# EAGLE board MTG COUNTER (EAGLE 9.7.0)

Size 113.33 x 124.01 mm. Coordinates in mm from the lower left corner, seen from the top.
Outline: 0,0 113.33,0 113.33,124.01 0,124.01 0,0
Copper layers (1*16): Top 0.035mm / dielectric 1.5mm / Bottom 0.035mm
Design rules "default": minimum track width 6mil, minimum drill 0.35mm, track to track 6mil, track to pad 6mil, pad to pad 6mil, via to via 6mil, smd to smd 6mil, copper to edge 40mil, drill to drill 6mil, minimum pad ring 10mil, minimum via ring 8mil, stop-mask expansion 4mil, vias tented up to drill 0mil, thermal gap 10mil

## Footprints (pad centres in the part's own frame; a part is rotated, then mirrored left to right if it is on the bottom)
7SEG-13 = drill 0.813 long: 1 -5.08,-7.62; 2 -2.54,-7.62; 3 0,-7.62; 4 2.54,-7.62; 5 5.08,-7.62; 6 5.08,7.62; 7 2.54,7.62; 8 0,7.62; 9 -2.54,7.62; 10 -5.08,7.62
RESAD1016W63L850D250B = drill 0.83 pad 1.43: 1 -5.08,0; 2 5.08,0
SWITCH-MOMENTARY-PTH-6.5MM = drill 1.016 pad 1.88: 1 -3.251,2.261; 2 3.251,2.261; 3 -3.251,-2.261; 4 3.251,-2.261
ARDUINO-UNO-R3-SHIELD = drill 1.016 pad 1.88: 3.3V 24.13,-2.54; 5V 24.13,0; A0 24.13,12.7; A1 24.13,15.24; A2 24.13,17.78; A3 24.13,20.32; A4 24.13,22.86; A5 24.13,25.4; AREF -24.13,-13.97; D2 -24.13,20.32; D3 -24.13,17.78; D4 -24.13,15.24; D5 -24.13,12.7; D6 -24.13,10.16; D7 -24.13,7.62; D8 -24.13,3.81; D9 -24.13,1.27; D10 -24.13,-1.27; D11 -24.13,-3.81; D12 -24.13,-6.35; D13 -24.13,-8.89; GND@0 24.13,2.54; GND@1 24.13,5.08; GND@2 -24.13,-11.43; IOREF 24.13,-7.62; NC 24.13,-10.16; RES 24.13,-5.08; RX -24.13,25.4; SCL -24.13,-19.05; SDA -24.13,-16.51; TX -24.13,22.86; VIN 24.13,7.62

## Placement (x,y rotation side)
DIGIT9  7SEG-CK  [7SEG-13]  69.77,109.38 0 top
DIGIT10  7SEG-CK  [7SEG-13]  83.6,109.39 0 top
DIGITDIGIT17  7SEG-CK  [7SEG-13]  45.16,109.75 0 top
DIGITDIGIT23  7SEG-CK  [7SEG-13]  31.43,109.91 0 top
R1  220  [RESAD1016W63L850D250B]  40.48,85.3 90 top
R2  220  [RESAD1016W63L850D250B]  20.93,86.02 90 top
R3  220  [RESAD1016W63L850D250B]  23.27,86.02 90 top
R4  220  [RESAD1016W63L850D250B]  25.81,85.82 90 top
R5  220  [RESAD1016W63L850D250B]  28.15,85.62 90 top
R6  220  [RESAD1016W63L850D250B]  30.69,85.62 90 top
R7  220  [RESAD1016W63L850D250B]  33.13,85.62 90 top
R8  220  [RESAD1016W63L850D250B]  35.46,85.42 90 top
R9  220  [RESAD1016W63L850D250B]  42.92,85.51 90 top
R10  220  [RESAD1016W63L850D250B]  45.56,85.51 90 top
R11  220  [RESAD1016W63L850D250B]  48.2,85.3 90 top
R12  220  [RESAD1016W63L850D250B]  50.83,85.3 90 top
R13  220  [RESAD1016W63L850D250B]  53.27,85.3 90 top
R14  220  [RESAD1016W63L850D250B]  55.7,85.51 90 top
R21  220  [RESAD1016W63L850D250B]  63.12,85.77 90 top
R22  220  [RESAD1016W63L850D250B]  65.66,85.56 90 top
R23  220  [RESAD1016W63L850D250B]  68,85.36 90 top
R24  220  [RESAD1016W63L850D250B]  70.54,85.36 90 top
R25  220  [RESAD1016W63L850D250B]  72.98,85.36 90 top
R26  220  [RESAD1016W63L850D250B]  75.32,85.16 90 top
R27  220  [RESAD1016W63L850D250B]  60.79,85.77 90 top
R28  220  [RESAD1016W63L850D250B]  80.34,85.05 90 top
R29  220  [RESAD1016W63L850D250B]  82.77,85.25 90 top
R30  220  [RESAD1016W63L850D250B]  85.41,85.25 90 top
R31  220  [RESAD1016W63L850D250B]  88.05,85.05 90 top
R32  220  [RESAD1016W63L850D250B]  90.69,85.05 90 top
R33  220  [RESAD1016W63L850D250B]  93.12,85.05 90 top
R34  220  [RESAD1016W63L850D250B]  95.56,85.25 90 top
S1  SWITCH_MOMENTARY  [SWITCH-MOMENTARY-PTH-6.5MM]  105.77,104.52 180 top
S2  SWITCH_MOMENTARY  [SWITCH-MOMENTARY-PTH-6.5MM]  7.41,107.12 180 top
S4  SWITCH_MOMENTARY  [SWITCH-MOMENTARY-PTH-6.5MM]  7.37,98.34 0 top
S5  SWITCH_MOMENTARY  [SWITCH-MOMENTARY-PTH-6.5MM]  105.96,96.49 180 top
U1  ARDUINO-UNO-R3-SHIELD  [ARDUINO-UNO-R3-SHIELD]  53.07,29.84 270 top

## Library data of the parts
DIGIT9 DIGIT10 DIGITDIGIT17 DIGITDIGIT23 = Tinkercad; CATEGORY: Opto-Electronic; SUB-CATEGORY: Display; TYPE: 7-Segment
R1-R14 R21-R34 S1 S2 S4 S5 U1 = Tinkercad

## Nets
DIGIT9_A: DIGIT9.7 R24.2
DIGIT9_B: DIGIT9.6 R26.2
DIGIT9_C: DIGIT9.4 R25.2
DIGIT9_D: DIGIT9.2 R23.2
DIGIT9_E: DIGIT9.1 R22.2
DIGIT9_F: DIGIT9.9 R21.2
DIGIT9_G: DIGIT9.10 R27.2
DIGIT10_A: DIGIT10.7 R32.2
DIGIT10_B: DIGIT10.6 R34.2
DIGIT10_C: DIGIT10.4 R33.2
DIGIT10_D: DIGIT10.2 R31.2
DIGIT10_E: DIGIT10.1 R30.2
DIGIT10_F: DIGIT10.9 R29.2
DIGIT10_G: DIGIT10.10 R28.2
DIGITDIGIT17_A: DIGITDIGIT17.7 R12.2
DIGITDIGIT17_B: DIGITDIGIT17.6 R14.2
DIGITDIGIT17_C: DIGITDIGIT17.4 R13.2
DIGITDIGIT17_D: DIGITDIGIT17.2 R11.2
DIGITDIGIT17_E: DIGITDIGIT17.1 R10.2
DIGITDIGIT17_F: DIGITDIGIT17.9 R9.2
DIGITDIGIT17_G: DIGITDIGIT17.10 R1.2
DIGITDIGIT23_A: DIGITDIGIT23.7 R6.2
DIGITDIGIT23_B: DIGITDIGIT23.6 R8.2
DIGITDIGIT23_C: DIGITDIGIT23.4 R7.2
DIGITDIGIT23_D: DIGITDIGIT23.2 R5.2
DIGITDIGIT23_E: DIGITDIGIT23.1 R4.2
DIGITDIGIT23_F: DIGITDIGIT23.9 R3.2
DIGITDIGIT23_G: DIGITDIGIT23.10 R2.2
U1_A5: S4.1 U1.A5
U1_D2: DIGIT10.3 U1.D2
U1_D3: DIGIT9.3 U1.D3
U1_D4: DIGITDIGIT17.3 U1.D4
U1_D5: DIGITDIGIT23.3 U1.D5
U1_D6: R8.1 R14.1 R26.1 R34.1 U1.D6
U1_D7: R7.1 R13.1 R25.1 R33.1 U1.D7
U1_D8: R6.1 R12.1 R24.1 R32.1 U1.D8
U1_D9: R5.1 R11.1 R23.1 R31.1 U1.D9
U1_D10: R4.1 R10.1 R22.1 R30.1 U1.D10
U1_D11: R3.1 R9.1 R21.1 R29.1 U1.D11
U1_D12: R1.1 R2.1 R27.1 R28.1 U1.D12
U1_D13: S2.3 U1.D13
U1_GND: S1.3 S2.2 S4.4 S5.1 U1.GND@0 U1.GND@1 U1.GND@2
U1_RX: S5.4 U1.RX
U1_TX: S1.2 U1.TX

## Tracks (layer width: path | path; a pad name or v marks a point on that pad's centre or on a via)
DIGIT9_A  (1 unrouted)
DIGIT9_B  (1 unrouted)
DIGIT9_C  (1 unrouted)
DIGIT9_D  (1 unrouted)
DIGIT9_E  (1 unrouted)
DIGIT9_F  (1 unrouted)
DIGIT9_G  (1 unrouted)
DIGIT10_A  (1 unrouted)
DIGIT10_B  (1 unrouted)
DIGIT10_C  (1 unrouted)
DIGIT10_D  (1 unrouted)
DIGIT10_E  (1 unrouted)
DIGIT10_F  (1 unrouted)
DIGIT10_G  (1 unrouted)
DIGITDIGIT17_A  (1 unrouted)
DIGITDIGIT17_B  (1 unrouted)
DIGITDIGIT17_C  (1 unrouted)
DIGITDIGIT17_D  (1 unrouted)
DIGITDIGIT17_E  (1 unrouted)
DIGITDIGIT17_F  (1 unrouted)
DIGITDIGIT17_G  (1 unrouted)
DIGITDIGIT23_A  (1 unrouted)
DIGITDIGIT23_B  (1 unrouted)
DIGITDIGIT23_C  (1 unrouted)
DIGITDIGIT23_D  (1 unrouted)
DIGITDIGIT23_E  (1 unrouted)
DIGITDIGIT23_F  (1 unrouted)
DIGITDIGIT23_G  (1 unrouted)
U1_A5  (1 unrouted)
U1_D2  (1 unrouted)
U1_D3  (1 unrouted)
U1_D4  (1 unrouted)
U1_D5  (1 unrouted)
U1_D6  (4 unrouted)
U1_D7  (4 unrouted)
U1_D8  (4 unrouted)
U1_D9  (4 unrouted)
U1_D10  (4 unrouted)
U1_D11  (4 unrouted)
U1_D12  (4 unrouted)
U1_D13  (1 unrouted)
U1_GND  (6 unrouted)
U1_RX  (1 unrouted)
U1_TX  (1 unrouted)